# Altium PCB PCB1.PcbDoc
Units mil, origin at the board's own origin, x right, y up, seen from the top; angles counter-clockwise.
Board outline 1771.65 x 1476.38 mil, 2 copper layers (Top Layer, Bottom Layer); 3 components, 24 nets, 49 pads, 0 vias.
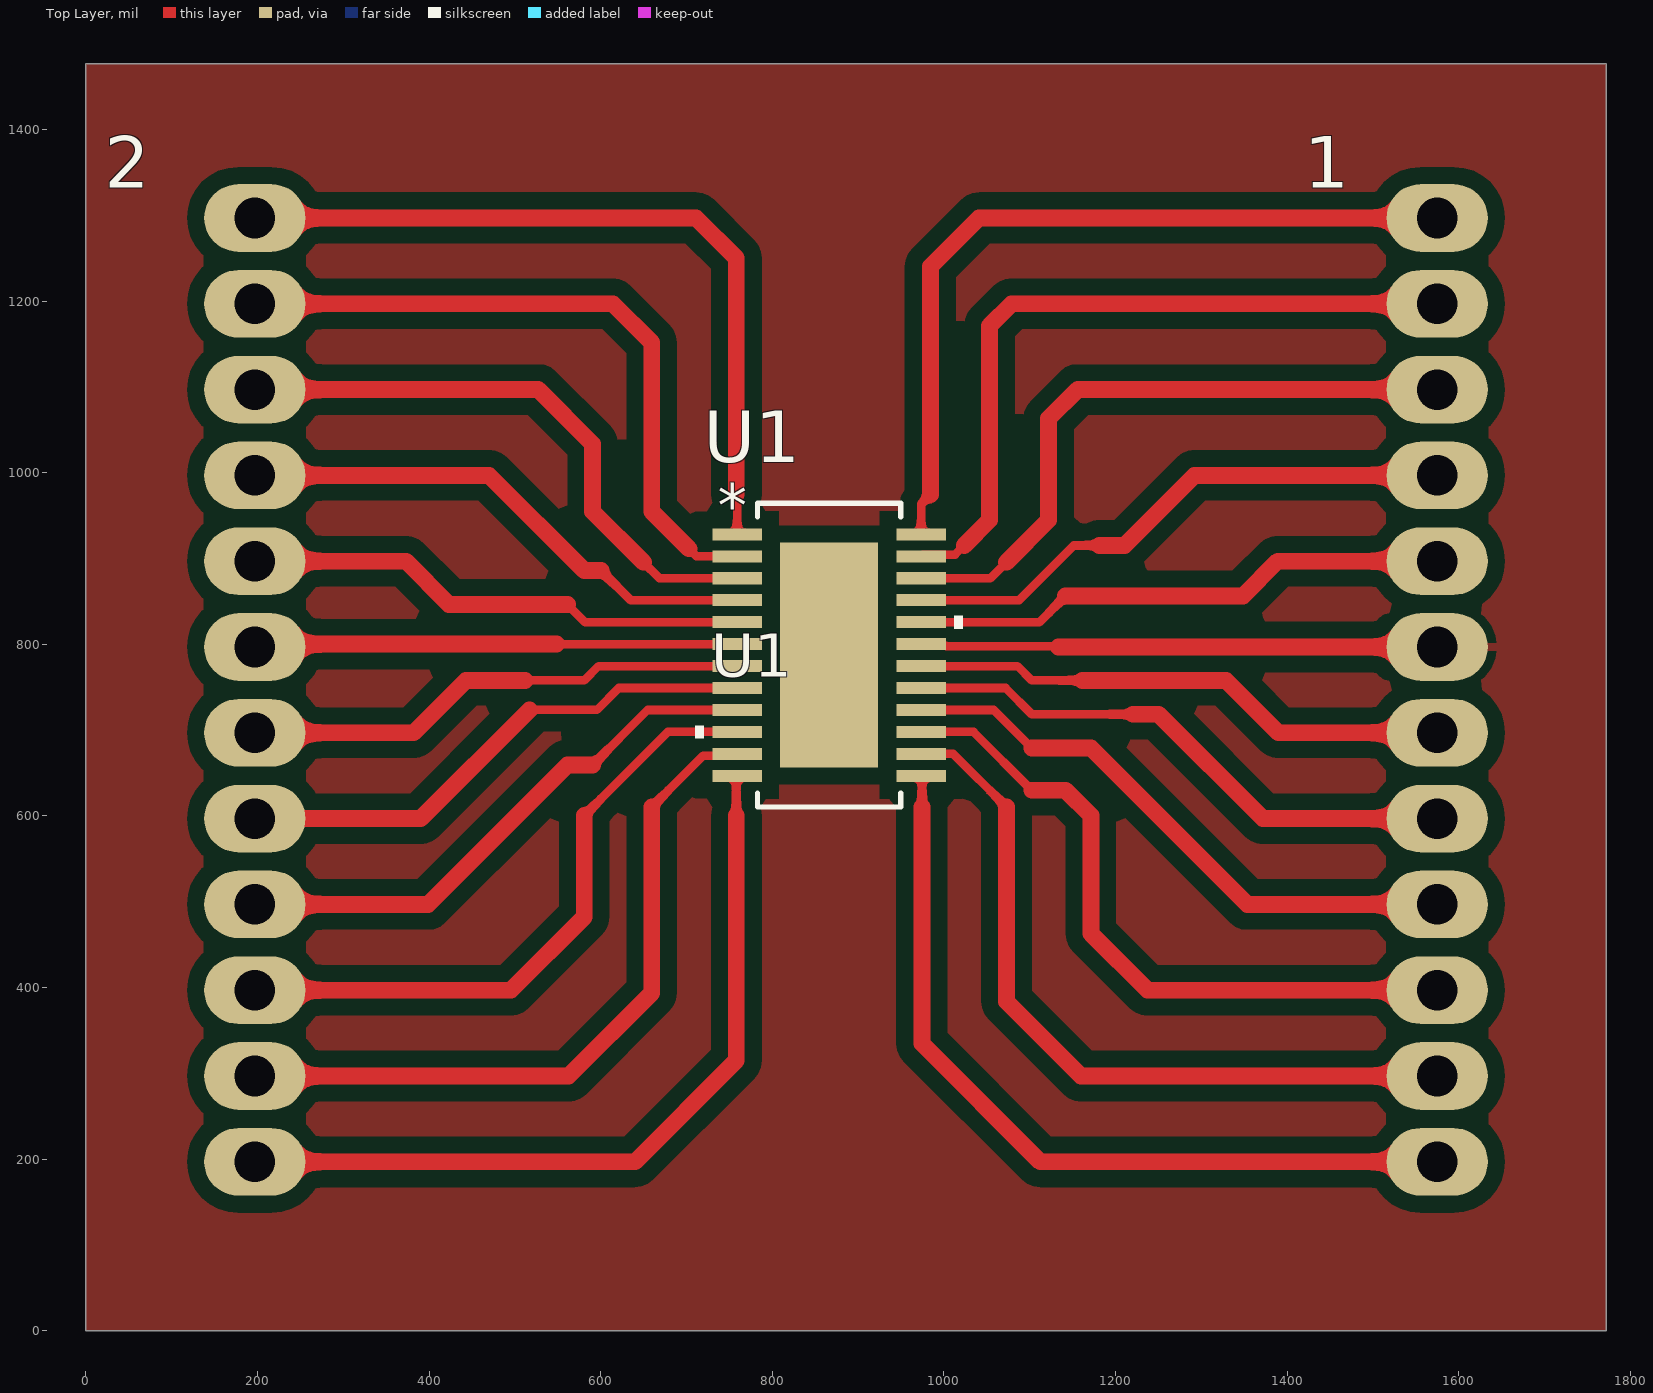
[diagram p0: Top Layer view]
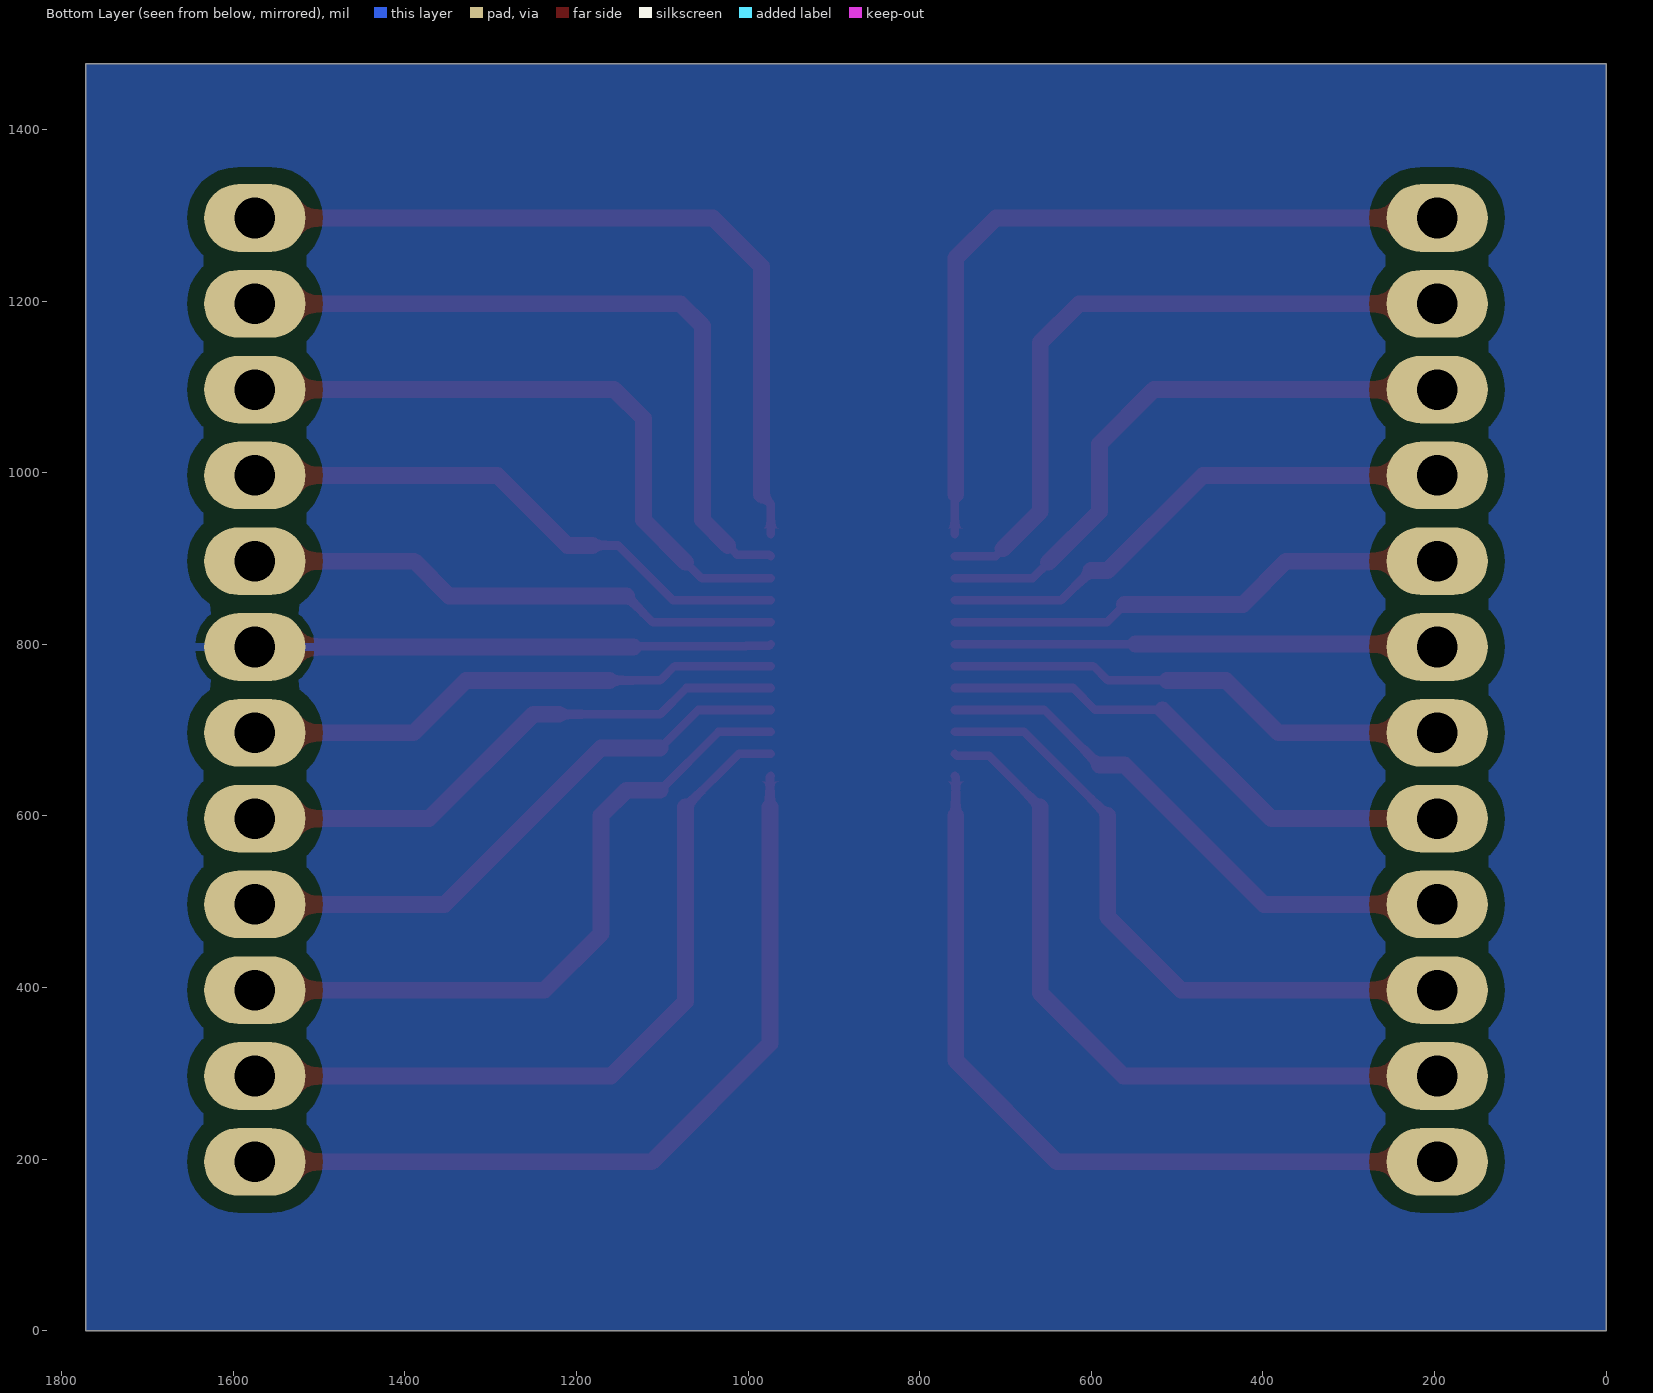
[diagram p1: Bottom Layer view, seen from below]
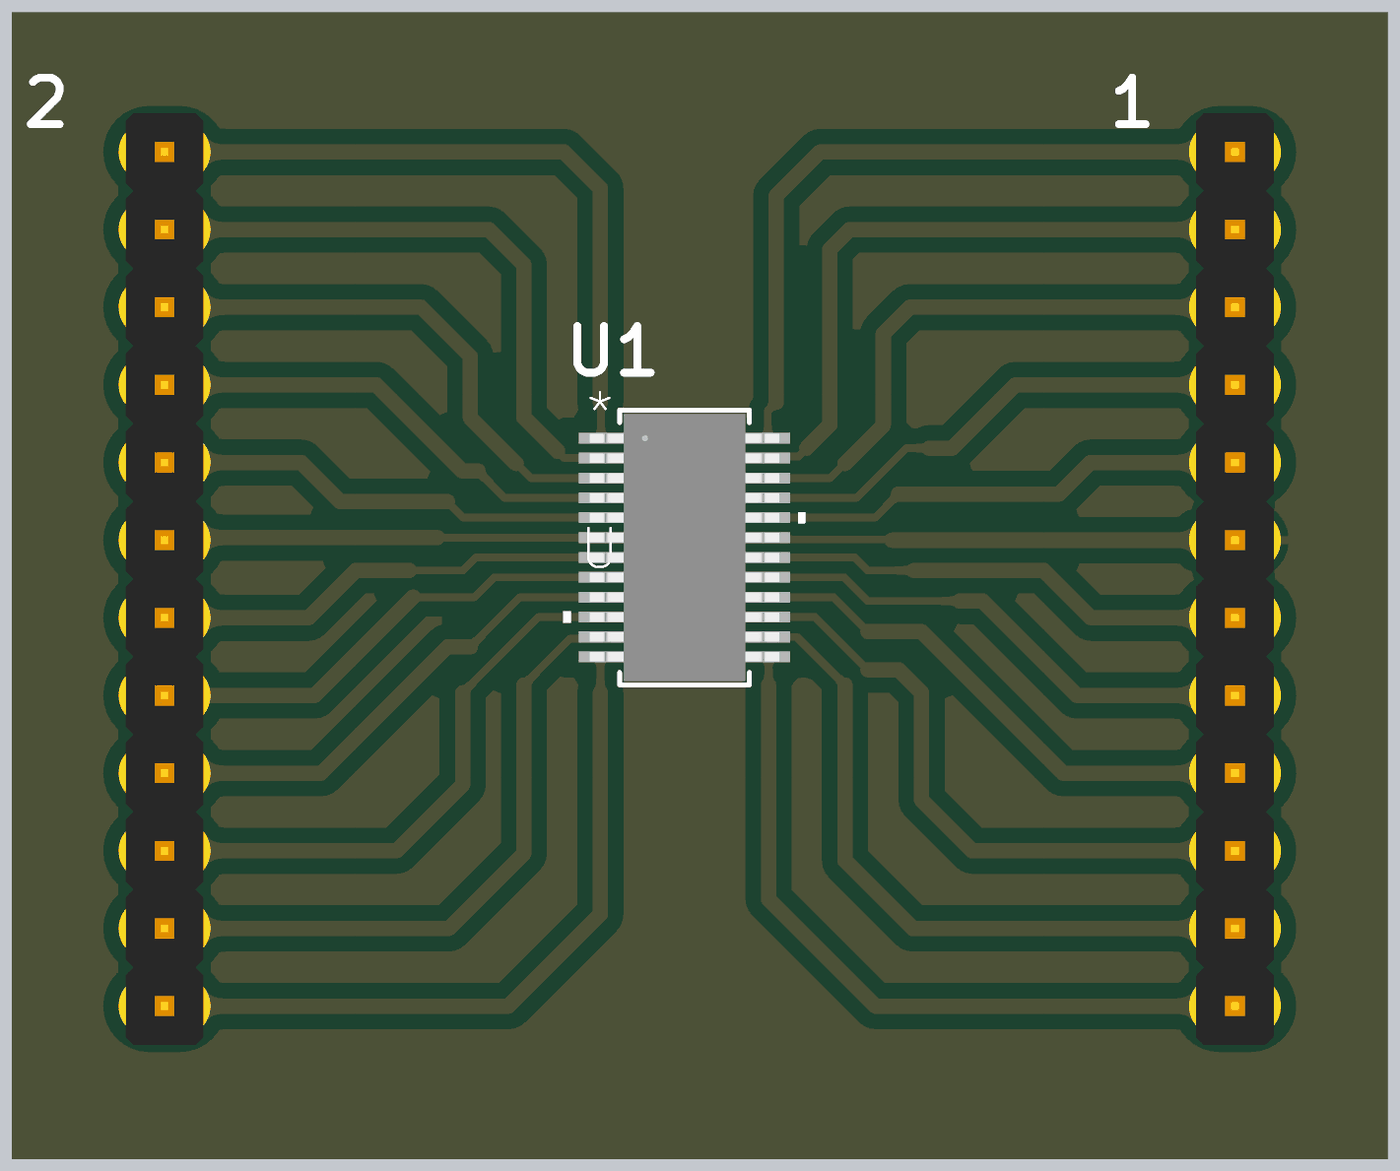
[diagram p2: 3D render of the assembled board from above, using the file's embedded part models]

## Layer stack, top to bottom
Top Solder: solder mask 0.4, Solder Resist, Dk 3.5
Top Layer: signal copper 1.4
Dielectric 1: dielectric 12.6, FR-4, Dk 4.8
Bottom Layer: signal copper 1.4
Bottom Solder: solder mask 0.4, Solder Resist, Dk 3.5

## Board outline
0,0 1771.65,0 1771.65,1476.38 0,1476.38

## Design rules (kind name [scope] priority, off if disabled: settings)
AssemblyTestPointUsage [All] p1: isadvanced=TRUE
AssemblyTestpoint [All] p1: isadvanced=TRUE testpointundercomponent=TRUE minsize=40 maxsize=100 preferedsize=60 minholesize=0 maxholesize=40 preferedholesize=32 testpointgrid=1 usegrid=TRUE gridtolerance=0.01 allowsidetop=TRUE allowsidebottom=TRUE
Clearance Clearance_1 [OnMid vs OnMid] p1: gap=9.84 ignorepadtopadclearanceinfootprint=FALSE except(10: Hole-Hole; 19.68: Arc-Fill Arc-Poly Arc-Region Track-Fill Track-Poly Track-Region SMDPad-Fill SMDPad-Poly SMDPad-Region THPad-Fill THPad-Poly THPad-Region Via-Fill Via-Poly Via-Region Fill-Fill Fill-Poly Fill-Region Fill-Text Poly-Poly Poly-Region Poly-Text Region-Region Region-Text) sourcerule=36 cellrowname=All cellrowtype=0 cellcolname=All cellcoltype=0 innerlayers=TRUE
Clearance Clearance_2 [(ExistsOnLayer('Top Layer') Or ExistsOnLayer('Bottom Layer')) vs (ExistsOnLayer('Top Layer') Or ExistsOnLayer('Bottom Layer'))] p2: gap=9.84 ignorepadtopadclearanceinfootprint=FALSE except(10: Hole-Hole; 19.68: Arc-Fill Arc-Poly Arc-Region Track-Fill Track-Poly Track-Region SMDPad-Fill SMDPad-Poly SMDPad-Region THPad-Fill THPad-Poly THPad-Region Via-Fill Via-Poly Via-Region Fill-Fill Fill-Poly Fill-Region Fill-Text Poly-Poly Poly-Region Poly-Text Region-Region Region-Text) sourcerule=36 cellrowname=All cellrowtype=0 cellcolname=All cellcoltype=0 outerlayers=TRUE
Clearance [All] p3: gap=10 ignorepadtopadclearanceinfootprint=FALSE ismatrix=TRUE
ComponentClearance [All] p1: isadvanced=TRUE gap=10 collisioncheckmode=3 verticalgap=10 showdistances=FALSE
DiffPairsRouting [All] p1: maxlimit=19.68 minlimit=10 mostfreqgap=19.68 toplayer_minwidth=15 toplayer_maxwidth=15 toplayer_prefwidth=15 bottomlayer_minwidth=15 bottomlayer_maxwidth=15 bottomlayer_prefwidth=15 maxuncoupledlength=500
FabricationTestPointUsage [All] p1: isadvanced=TRUE valid=0 allowmultiple=FALSE
FabricationTestpoint [All] p1: isadvanced=TRUE side=3 testpointundercomponent=TRUE minsize=40 maxsize=100 preferedsize=60 minholesize=0 maxholesize=40 preferedholesize=32 testpointgrid=1 allowsidetop=TRUE allowsidebottom=TRUE usegrid=TRUE gridtolerance=0.01
FanoutControl Fanout_BGA [IsBGA] p1: isadvanced=TRUE bgadir=Out bgaviamode=Centered fanoutstyle=Auto fanoutdirection=Alternating viagrid=1 // Fanout_BGA (Default Rule)
FanoutControl Fanout_LCC [IsLCC] p2: isadvanced=TRUE bgadir=Out bgaviamode=Centered fanoutstyle=Auto fanoutdirection=Alternating viagrid=1 // Fanout_LCC (Default Rule)
FanoutControl Fanout_SOIC [IsSOIC] p3: isadvanced=TRUE bgadir=Out bgaviamode=Centered fanoutstyle=Auto fanoutdirection=Alternating viagrid=1 // Fanout_SOIC (Default Rule)
FanoutControl Fanout_Small [(CompPinCount < 5)] p4: isadvanced=TRUE bgadir=Out bgaviamode=Centered fanoutstyle=Auto fanoutdirection=OutThenIn viagrid=1 // Fanout_Small (Default Rule)
FanoutControl Fanout_Default [All] p5: isadvanced=TRUE bgadir=Out bgaviamode=Centered fanoutstyle=Auto fanoutdirection=Alternating viagrid=1 // Fanout_Default (Default Rule)
Height [All] p1: isadvanced=TRUE minheight=0 maxheight=1000 prefheight=500
HoleSize [All] p1: isadvanced=TRUE absolutevalues=TRUE maxlimit=100 minlimit=1 maxpercent=80.000 minpercent=20.000
HoleToHoleClearance [All] p1: isadvanced=TRUE gap=10 allowstackedmicrovias=TRUE
LayerPairs [All] p1: isadvanced=TRUE enforce=TRUE
MinimumSolderMaskSliver [All] p1: isadvanced=TRUE minsoldermaskwidth=10
NetAntennae [All] p1: isadvanced=TRUE netantennaetolerance=0
PasteMaskExpansion [All] p1: isadvanced=TRUE expansion=0
PlaneClearance [All] p1: isadvanced=TRUE clearance=20
PlaneConnect [All] p1: isadvanced=TRUE planeconnectstyle=Relief reliefexpansion=20 reliefentries=4 reliefconductorwidth=10 reliefairgap=10
PolygonConnect [All] p1: connectstyle=Relief reliefconductorwidth=10 reliefentries=4 polygonreliefangle="90 Angle" airgapwidth=10
RoutingCorners [All] p1: isadvanced=TRUE cornerstyle=45-Degree minsetback=100 maxsetback=100
RoutingPriority [All] p1: isadvanced=TRUE routingpriority=0
RoutingVias [All] p1: holewidth=28 width=50 viastyle="Through Hole" minholewidth=28 minwidth=50 maxholewidth=28 maxwidth=50
ShortCircuit [All] p1: isadvanced=TRUE allowed=FALSE
SilkToSilkClearance [All] p1: isadvanced=TRUE silktosilkclearance=10
SilkToSolderMaskClearance [IsPad] p1: isadvanced=TRUE minsilkscreentomaskgap=10 clearancetoexposedcopper=TRUE
SolderMaskExpansion [All] p1: isadvanced=TRUE expansion=0 istentingtop=FALSE
UnRoutedNet [All] p1: isadvanced=TRUE
UnpouredPolygon [All] p1: isadvanced=TRUE
Width [All] p1: maxlimit=19.68 minlimit=10 preferedwidth=19.68 minimp=50.000000 maximp=50.000000 favimp=50.000000
3 further rules are at their usual default settings.

## Components (designator, comment, footprint, x,y, rotation, side; value= is the part's Value field where it differs from the comment)
1 "12 Pin Header" "12 Pin Header-Footprint-1" 1574.8,196.85 r0 top
2 "12 Pin Header" "12 Pin Header-Footprint-1" 196.85,196.85 r0 top
U1 "TLE7181EMXUMA1" PG-SSOP-4_INF 866.14,787.4 r0 top

## Footprints (in the part's own frame and the unit in brackets; to place one, negate y for a bottom-side part, rotate by r counter-clockwise, add the part's x,y. Pads: shape width x height; smd on the part's side, far side on the other; paste and mask are expansions set on the pad)
"12 Pin Header-Footprint-1" [mm]
  oval 3x2 hole 1.2: 1(0,27.94) 2(0,25.4) 3(0,22.86) 4(0,20.32) 5(0,17.78) 6(0,15.24) 7(0,12.7) 8(0,10.16) 9(0,7.62) 10(0,5.08) 11(0,2.54) 12(0,0)
  body extent -1.27,-1.27 1.27,29.21, height 8.89
PG-SSOP-4_INF [mil]
  rect 57.5x14 smd paste+0 mask+0: 1(-107.25,140.75) 2(-107.25,115.16) 3(-107.25,89.57) 4(-107.25,63.98) 5(-107.25,38.39) 6(-107.25,12.8) 7(-107.25,-12.8) 8(-107.25,-38.39) 9(-107.25,-63.98) 10(-107.25,-89.57) 11(-107.25,-115.16) 12(-107.25,-140.75) 13(107.25,-140.75) 14(107.25,-115.16) 15(107.25,-89.57) 16(107.25,-63.98) 17(107.25,-38.39) 18(107.25,-12.8) 19(107.25,12.8) 20(107.25,38.39) 21(107.25,63.98) 22(107.25,89.57) 23(107.25,115.16) 24(107.25,140.75)
  rect 114x262 smd paste-130.5 mask+0: EPAD(0,0)
  silkscreen extent -156,-177 156,177, body extent -122,-172 122,172, height 67

## Part data
1 2: library part CMP-002-00071-1, Gender=male, Pins=12
U1: "It incorporates several protection features such as over current and short circuit detection as well as under-, over voltage and over temperature diagnosis. Typical applications are fans, pumps and electric power steering. The MOTIXâ„¢ TLE7181EM is designed for a 12V power net.", Manufacturer_Name=Infineon, Copyright="Copyright (C) 2026 Ultra Librarian. All rights reserved.", Datasheet=https://www.infineon.com/dgdl/Infineon-TLE7181EM-DS-v01_01-en.pdf?fileId=db3a30432f5008fe012f5440330e3991, Manufacturer_Part_Number=TLE7181EMXUMA1, RefDes=RefDes, Type=Type

## Nets (pads, with @x,y where several pads share a name; then routed paths per layer and width w, separated by ;. In a path a pad name is that pad's centre, name@x,y a point inside that pad or via, vN(x,y) a via of type N, cw(c..) or ccw(c..) an arc to the next point about the centre after c; other vN are vias at no path point)
Net1_1: 1.1 U1.24 | length 930.5
  Top Layer w10: U1.24 973.39,963.55 984.25,974.41
  Top Layer w19.68: 984.25,974.41 984.25,1240.16 1040.94,1296.85 1.1
Net1_2: 1.2 U1.23 | length 855.9
  Top Layer w10: U1.23 975.39,904.56 1012.83,904.56 1023.62,915.35
  Top Layer w19.68: 1023.62,915.35 1053.15,944.88 1053.15,1171.26 1078.74,1196.85 1.2
Net1_3: 1.3 U1.22 | length 761.7
  Top Layer w10: U1.22 1054.13,876.97 1072.83,895.67
  Top Layer w19.68: 1072.83,895.67 1122.05,944.88 1122.05,1062.99 1155.91,1096.85 1.3
Net1_4: 1.4 U1.21 | length 661.7
  Top Layer w10: U1.21 1087.6,851.38 1151.57,915.35 1181.1,915.35
  Top Layer w19.68: 1181.1,915.35 1210.63,915.35 1292.13,996.85 1.4
Net1_5: 1.5 U1.20 | length 630.8
  Top Layer w10: U1.20 1111.22,825.79 1141.73,856.3
  Top Layer w19.68: 1141.73,856.3 1348.43,856.3 1388.98,896.85 1.5
Net1_6: 1.6 U1.19 | length 602.8
  Top Layer w10: U1.19 975.39,798.2 1002.56,798.2 1003,797.76 1132.4,797.76 1133.31,796.85
  Top Layer w19.68: 1133.31,796.85 1.6
Net1_7: 1.7 U1.18 | length 633.6
  Top Layer w10: U1.18 1085.63,774.61 1102.36,757.87 1161.42,757.87
  Top Layer w19.68: 1161.42,757.87 1328.74,757.87 1389.76,696.85 1.7
Net1_8: 1.8 U1.17 | length 664.4
  Top Layer w10: U1.17 1071.85,749.02 1102.36,718.5 1220.47,718.5
  Top Layer w19.68: 1220.47,718.5 1250,718.5 1371.65,596.85 1.8
Net1_9: 1.9 U1.16 | length 695.3
  Top Layer w10: U1.16 1058.07,723.43 1102.36,679.13
  Top Layer w19.68: 1102.36,679.13 1171.26,679.13 1353.54,496.85 1.9
Net1_10: 1.10 U1.15 | length 806.8
  Top Layer w10: U1.15 1034.45,697.83 1102.36,629.92
  Top Layer w19.68: 1102.36,629.92 1141.73,629.92 1171.26,600.39 1171.26,462.6 1237.01,396.85 1.10
Net1_11: 1.11 U1.14 | length 889.5
  Top Layer w10: U1.14 1010.83,672.24 1072.83,610.24
  Top Layer w19.68: 1072.83,610.24 1072.83,383.86 1159.84,296.85 1.11
Net1_12: 1.12 U1.13 | length 969.9
  Top Layer w10: U1.13 974.41,645.64 974.41,610.24
  Top Layer w19.68: 974.41,610.24 974.41,334.65 1112.2,196.85 1.12
Net2_1: 2.1 U1.1 | length 902.7
  Top Layer w10: 757.87,974.41 758.89,973.39 U1.1
  Top Layer w19.68: 2.1 711.02,1296.85 757.87,1250 757.87,974.41
Net2_2: 2.2 U1.2 | length 799.3
  Top Layer w10: 702.85,911.33 711.61,902.56 U1.2
  Top Layer w19.68: 2.2 614.17,1196.85 659.45,1151.57 659.45,954.72 702.85,911.33
Net2_3: 2.3 U1.3 | length 699.2
  Top Layer w10: 649.61,895.67 668.31,876.97 U1.3
  Top Layer w19.68: 2.3 527.17,1096.85 590.55,1033.46 590.55,954.72 649.61,895.67
Net2_4: 2.4 U1.4 | length 622.3
  Top Layer w10: 600.39,885.83 634.84,851.38 U1.4
  Top Layer w19.68: 2.4 469.68,996.85 580.71,885.83 600.39,885.83
Net2_5: 2.5 U1.5 | length 591.5
  Top Layer w10: 561.02,846.46 581.69,825.79 U1.5
  Top Layer w19.68: 2.5 372.83,896.85 423.23,846.46 561.02,846.46
Net2_6: 2.6 U1.6 | length 563.4
  Top Layer w10: 548.23,800.2 U1.6
  Top Layer w19.68: 2.6 200.2,800.2 548.23,800.2
Net2_7: 2.7 U1.7 | length 594.2
  Top Layer w10: 511.81,757.87 580.71,757.87 597.44,774.61 U1.7
  Top Layer w19.68: 2.7 381.89,696.85 442.91,757.87 511.81,757.87
Net2_8: 2.8 U1.8 | length 625.1
  Top Layer w10: 516.81,723.5 595.55,723.5 621.06,749.02 U1.8
  Top Layer w19.68: 2.8 390.16,596.85 516.81,723.5
Net2_9: 2.9 U1.9 | length 655.9
  Top Layer w10: 590.55,659.45 654.53,723.43 U1.9
  Top Layer w19.68: 2.9 398.43,496.85 561.02,659.45 590.55,659.45
Net2_10: 2.10 U1.10 | length 755.9
  Top Layer w10: 580.71,600.39 678.15,697.83 U1.10
  Top Layer w19.68: 2.10 495.28,396.85 580.71,482.28 580.71,600.39
Net2_11: 2.11 U1.11 | length 844.4
  Top Layer w10: 659.45,610.24 719.46,670.24 756.89,670.24 U1.11
  Top Layer w19.68: 2.11 562.6,296.85 659.45,393.7 659.45,610.24
Net2_12: 2.12 U1.12 | length 942.1
  Top Layer w10: 757.87,600.39 757.87,645.64 U1.12
  Top Layer w19.68: 2.12 639.76,196.85 757.87,314.96 757.87,600.39
pads on no net: U1.EPAD

## Polygon pours and split planes (outlines as drawn)
Net1_6 on Top Layer "NET1_6_L01_P000" (solid, pour order 0): 0,0 1771.65,0 1771.65,1476.38 0,1476.38
Net1_6 on Bottom Layer "NET1_6_L02_P001" (solid, pour order 1): 0,1476.38 1771.65,1476.38 1771.65,0 0,0

## Text inside footprints (layer, text, board x,y; h text height)
U1: Top Overlay "*" at 736.39,937.15 h50; Top 3D Body "*" at 790.14,906.4 h50